# EAGLE board 16ch_omn_hirose_adapter_400mil (EAGLE 7.3.0)
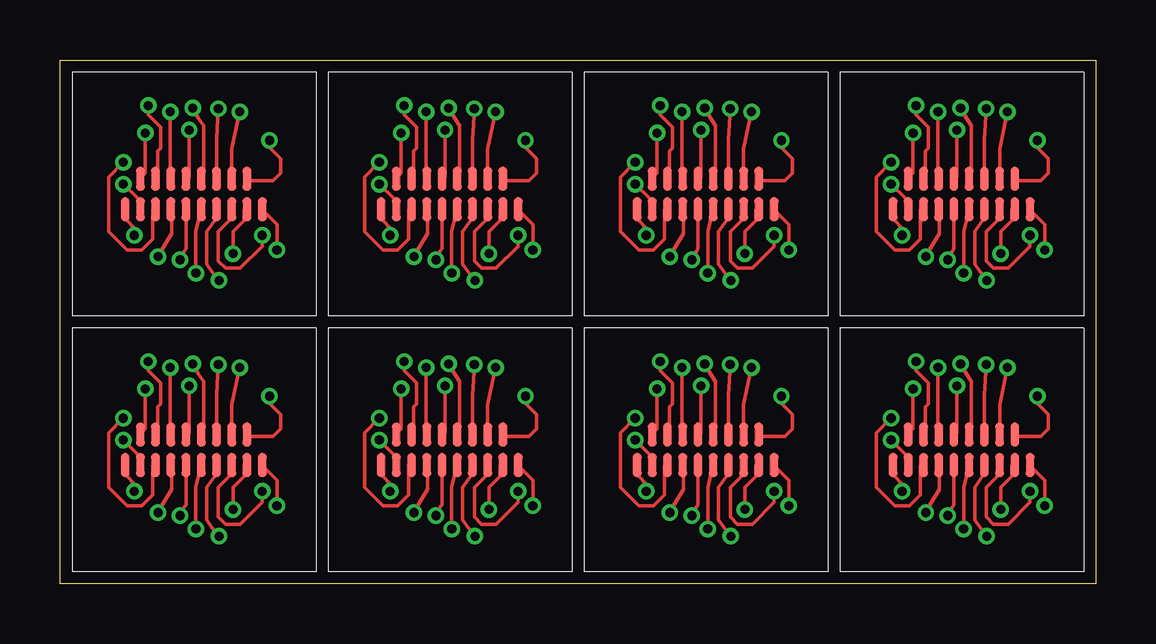
[diagram p0: board, top side]
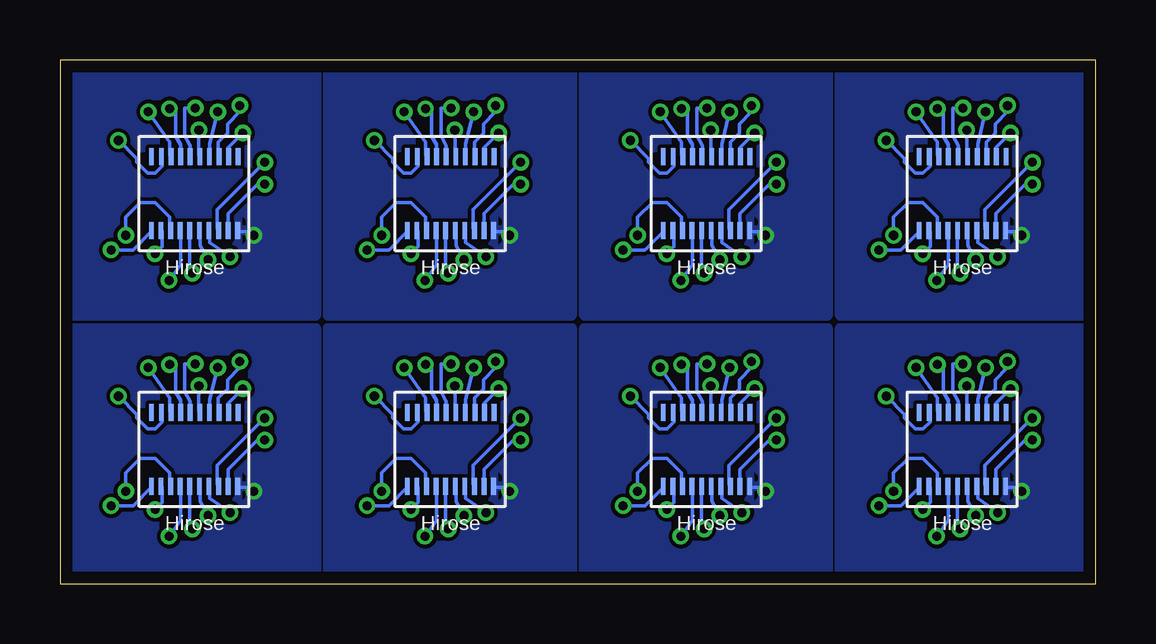
[diagram p1: board, bottom side, seen from below]

Size 43.18 x 21.84 mm. Coordinates in mm from the lower left corner, seen from the top.
Outline: 0,0 0,21.84 43.18,21.84 43.18,0 0,0
Copper layers (1*16): Top 0.035mm / dielectric 1.5mm / Bottom 0.035mm
Design rules "4pcb_33_gg *": minimum track width 6mil, minimum drill 15mil, track to track 6mil, track to pad 6mil, pad to pad 6mil, via to via 6mil, smd to smd 6mil, copper to edge 20mil, drill to drill 6mil, minimum pad ring 6mil, minimum via ring 6mil, stop-mask expansion 4mil, vias tented up to drill 0mil, thermal gap 10mil

## Footprints (pad centres in the part's own frame; a part is rotated, then mirrored left to right if it is on the bottom)
HIROSE_DF40C-70DS = smd 0.2 x 0.7: P$1 0,0; P$2 -0.4,0; P$3 -0.8,0; P$4 -1.2,0; P$5 -1.6,0; P$6 -2,0; P$7 -2.4,0; P$8 -2.8,0; P$9 -3.2,0; P$10 -3.6,0; P$36 0,-3.08; P$37 -0.42,-3.08; P$38 -0.82,-3.08; P$39 -1.22,-3.08; P$40 -1.62,-3.08; P$41 -2.02,-3.08; P$42 -2.42,-3.08; P$43 -2.82,-3.08; P$44 -3.22,-3.08; P$45 -3.62,-3.08
OMNETICS_FE18 = smd 0.381 x 1.016: P$1 -1.905,0.635; P$2 -1.27,0.635; P$3 -0.635,0.635; P$4 0,0.635; P$5 0.635,0.635; P$6 1.27,0.635; P$7 1.905,0.635; P$8 2.54,0.635; P$9 2.54,-0.635; P$10 1.905,-0.635; P$11 1.27,-0.635; P$12 0.635,-0.635; P$13 0,-0.635; P$14 -0.635,-0.635; P$15 -1.27,-0.635; P$16 -1.905,-0.635; P$17 -2.54,0.635; P$18 3.175,0.635

## Placement (x,y rotation side)
U$1  HIROSE_DF40_70PIN  [HIROSE_DF40C-70DS]  18.03,14.73 180 bottom
U$2  OMNETICS_FE18  [OMNETICS_FE18]  16.56,16.26 180 top
U$3  HIROSE_DF40_70PIN  [HIROSE_DF40C-70DS]  7.37,4.06 180 bottom
U$4  OMNETICS_FE18  [OMNETICS_FE18]  5.89,5.59 180 top
U$5  HIROSE_DF40_70PIN  [HIROSE_DF40C-70DS]  18.03,4.06 180 bottom
U$6  OMNETICS_FE18  [OMNETICS_FE18]  16.56,5.59 180 top
U$7  HIROSE_DF40_70PIN  [HIROSE_DF40C-70DS]  7.37,14.73 180 bottom
U$8  OMNETICS_FE18  [OMNETICS_FE18]  5.89,16.26 180 top
U$9  HIROSE_DF40_70PIN  [HIROSE_DF40C-70DS]  28.7,14.73 180 bottom
U$10  OMNETICS_FE18  [OMNETICS_FE18]  27.23,16.26 180 top
U$11  HIROSE_DF40_70PIN  [HIROSE_DF40C-70DS]  39.37,14.73 180 bottom
U$12  OMNETICS_FE18  [OMNETICS_FE18]  37.9,16.26 180 top
U$13  HIROSE_DF40_70PIN  [HIROSE_DF40C-70DS]  28.7,4.06 180 bottom
U$14  OMNETICS_FE18  [OMNETICS_FE18]  27.23,5.59 180 top
U$15  HIROSE_DF40_70PIN  [HIROSE_DF40C-70DS]  39.37,4.06 180 bottom
U$16  OMNETICS_FE18  [OMNETICS_FE18]  37.9,5.59 180 top

## Library data of the parts
U$1 U$3 U$5 U$7 U$9 U$11 U$13 U$15 = GG_hirose20
U$2 U$4 U$6 U$8 U$10 U$12 U$14 U$16 = connectors

## Nets
N$1: U$1.P$10 U$2.P$18
N$2: U$1.P$9 U$2.P$8
N$3: U$1.P$8 U$2.P$7
N$4: U$1.P$7 U$2.P$6
N$5: U$1.P$6 U$2.P$5
N$6: U$1.P$5 U$2.P$4
N$7: U$1.P$4 U$2.P$3
N$8: U$1.P$3 U$2.P$2
N$9: U$1.P$2 U$2.P$1
N$10: U$1.P$1 U$2.P$17
N$11: U$1.P$44 U$2.P$9
N$12: U$1.P$43 U$2.P$10
N$13: U$1.P$42 U$2.P$11
N$14: U$1.P$41 U$2.P$12
N$15: U$1.P$40 U$2.P$13
N$16: U$1.P$39 U$2.P$14
N$17: U$1.P$38 U$2.P$15
N$18: U$1.P$37 U$2.P$16
N$19: U$3.P$10 U$4.P$18
N$20: U$3.P$9 U$4.P$8
N$21: U$3.P$8 U$4.P$7
N$22: U$3.P$7 U$4.P$6
N$23: U$3.P$6 U$4.P$5
N$24: U$3.P$5 U$4.P$4
N$25: U$3.P$4 U$4.P$3
N$26: U$3.P$3 U$4.P$2
N$27: U$3.P$2 U$4.P$1
N$28: U$3.P$1 U$4.P$17
N$29: U$3.P$44 U$4.P$9
N$30: U$3.P$43 U$4.P$10
N$31: U$3.P$42 U$4.P$11
N$32: U$3.P$41 U$4.P$12
N$33: U$3.P$40 U$4.P$13
N$34: U$3.P$39 U$4.P$14
N$35: U$3.P$38 U$4.P$15
N$36: U$3.P$37 U$4.P$16
N$37: U$5.P$10 U$6.P$18
N$38: U$5.P$9 U$6.P$8
N$39: U$5.P$8 U$6.P$7
N$40: U$5.P$7 U$6.P$6
N$41: U$5.P$6 U$6.P$5
N$42: U$5.P$5 U$6.P$4
N$43: U$5.P$4 U$6.P$3
N$44: U$5.P$3 U$6.P$2
N$45: U$5.P$2 U$6.P$1
N$46: U$5.P$1 U$6.P$17
N$47: U$5.P$44 U$6.P$9
N$48: U$5.P$43 U$6.P$10
N$49: U$5.P$42 U$6.P$11
N$50: U$5.P$41 U$6.P$12
N$51: U$5.P$40 U$6.P$13
N$52: U$5.P$39 U$6.P$14
N$53: U$5.P$38 U$6.P$15
N$54: U$5.P$37 U$6.P$16
N$55: U$7.P$10 U$8.P$18
N$56: U$7.P$9 U$8.P$8
N$57: U$7.P$8 U$8.P$7
N$58: U$7.P$7 U$8.P$6
N$59: U$7.P$6 U$8.P$5
N$60: U$7.P$5 U$8.P$4
N$61: U$7.P$4 U$8.P$3
N$62: U$7.P$3 U$8.P$2
N$63: U$7.P$2 U$8.P$1
N$64: U$7.P$1 U$8.P$17
N$65: U$7.P$44 U$8.P$9
N$66: U$7.P$43 U$8.P$10
N$67: U$7.P$42 U$8.P$11
N$68: U$7.P$41 U$8.P$12
N$69: U$7.P$40 U$8.P$13
N$70: U$7.P$39 U$8.P$14
N$71: U$7.P$38 U$8.P$15
N$72: U$7.P$37 U$8.P$16
N$73: U$9.P$10 U$10.P$18
N$74: U$9.P$9 U$10.P$8
N$75: U$9.P$8 U$10.P$7
N$76: U$9.P$7 U$10.P$6
N$77: U$9.P$6 U$10.P$5
N$78: U$9.P$5 U$10.P$4
N$79: U$9.P$4 U$10.P$3
N$80: U$9.P$3 U$10.P$2
N$81: U$9.P$2 U$10.P$1
N$82: U$9.P$1 U$10.P$17
N$83: U$9.P$44 U$10.P$9
N$84: U$9.P$43 U$10.P$10
N$85: U$9.P$42 U$10.P$11
N$86: U$9.P$41 U$10.P$12
N$87: U$9.P$40 U$10.P$13
N$88: U$9.P$39 U$10.P$14
N$89: U$9.P$38 U$10.P$15
N$90: U$9.P$37 U$10.P$16
N$91: U$11.P$10 U$12.P$18
N$92: U$11.P$9 U$12.P$8
N$93: U$11.P$8 U$12.P$7
N$94: U$11.P$7 U$12.P$6
N$95: U$11.P$6 U$12.P$5
N$96: U$11.P$5 U$12.P$4
N$97: U$11.P$4 U$12.P$3
N$98: U$11.P$3 U$12.P$2
N$99: U$11.P$2 U$12.P$1
N$100: U$11.P$1 U$12.P$17
N$101: U$11.P$44 U$12.P$9
N$102: U$11.P$43 U$12.P$10
N$103: U$11.P$42 U$12.P$11
N$104: U$11.P$41 U$12.P$12
N$105: U$11.P$40 U$12.P$13
N$106: U$11.P$39 U$12.P$14
N$107: U$11.P$38 U$12.P$15
N$108: U$11.P$37 U$12.P$16
N$109: U$13.P$10 U$14.P$18
N$110: U$13.P$9 U$14.P$8
N$111: U$13.P$8 U$14.P$7
N$112: U$13.P$7 U$14.P$6
N$113: U$13.P$6 U$14.P$5
N$114: U$13.P$5 U$14.P$4
N$115: U$13.P$4 U$14.P$3
N$116: U$13.P$3 U$14.P$2
N$117: U$13.P$2 U$14.P$1
N$118: U$13.P$1 U$14.P$17
N$119: U$13.P$44 U$14.P$9
N$120: U$13.P$43 U$14.P$10
N$121: U$13.P$42 U$14.P$11
N$122: U$13.P$41 U$14.P$12
N$123: U$13.P$40 U$14.P$13
N$124: U$13.P$39 U$14.P$14
N$125: U$13.P$38 U$14.P$15
N$126: U$13.P$37 U$14.P$16
N$127: U$15.P$10 U$16.P$18
N$128: U$15.P$9 U$16.P$8
N$129: U$15.P$8 U$16.P$7
N$130: U$15.P$7 U$16.P$6
N$131: U$15.P$6 U$16.P$5
N$132: U$15.P$5 U$16.P$4
N$133: U$15.P$4 U$16.P$3
N$134: U$15.P$3 U$16.P$2
N$135: U$15.P$2 U$16.P$1
N$136: U$15.P$1 U$16.P$17
N$137: U$15.P$44 U$16.P$9
N$138: U$15.P$43 U$16.P$10
N$139: U$15.P$42 U$16.P$11
N$140: U$15.P$41 U$16.P$12
N$141: U$15.P$40 U$16.P$13
N$142: U$15.P$39 U$16.P$14
N$143: U$15.P$38 U$16.P$15
N$144: U$15.P$37 U$16.P$16

## Tracks (layer width: path | path; a pad name or v marks a point on that pad's centre or on a via)
N$1  (via drill 0.38)
  Top 0.152: v13.77,14.53 13.77,14.83 13.46,15.14 13.46,15.6 U$2.P$18
  Bottom 0.152: v13.77,14.53 13.92,14.68 14.38,14.68 U$1.P$10
  pour Bottom: 11.18,21.34 11.18,11.18 21.34,11.18 21.34,21.34
N$2  (via drill 0.38)
  Top 0.152: v13.31,16.66 13.92,16.05 13.92,15.75 U$2.P$8
  Bottom 0.152: v13.31,16.66 13.61,16.66 14.83,15.44 14.83,14.83 U$1.P$9
N$3  (via drill 0.38)
  Top 0.152: v13.31,17.58 12.7,16.97 12.7,14.68 13.46,13.92 14.07,13.92 14.53,14.38 14.53,15.6 U$2.P$7
  Bottom 0.152: v13.31,17.58 15.29,15.6 15.29,14.83 U$1.P$8
N$4  (via drill 0.38)
  Top 0.152: v14.76,13.64 14.73,13.64 15.32,14.61 15.32,15.44 15.29,15.6 U$2.P$6
  Bottom 0.152: v14.76,13.64 15.6,14.22 15.6,14.68 U$1.P$7
N$5  (via drill 0.38)
  Top 0.152: U$2.P$5 15.93,13.97 15.87,13.89 v15.67,13.51
  Bottom 0.152: v15.67,13.51 16,14.1 16,14.68 16.05,14.68 U$1.P$6
N$6  (via drill 0.38 pad 0.41)
  Top 0.152: U$2.P$4 16.33,14.68 v16.33,12.95
  Bottom 0.152: U$1.P$5 16.43,14.68 16.43,12.95 | 16.48,12.95 16.43,12.95 | 16.43,12.95 v16.33,12.95
N$7  (via drill 0.38)
  Top 0.152: v17.3,12.65 17.27,12.65 16.79,13.34 16.79,14.68 17.12,15.14 17.12,15.6 U$2.P$3
  Bottom 0.152: v17.3,12.65 16.82,13.31 16.82,14.68 U$1.P$4
N$8  (via drill 0.38)
  Top 0.152: v19.1,14.53 19.1,14.07 18.19,13.16 17.58,13.16 17.27,13.46 17.27,14.68 17.73,15.14 17.73,15.6 U$2.P$2
  Bottom 0.152: v19.1,14.53 19.1,15.29 18.49,15.9 17.88,15.9 17.27,15.29 17.27,14.83 U$1.P$3
N$9  (via drill 0.38)
  Top 0.152: v17.88,13.77 17.88,14.68 18.34,15.14 18.34,15.6 U$2.P$1
  Bottom 0.152: v17.88,13.77 17.58,14.07 17.58,14.68 U$1.P$2
N$10  (via drill 0.38)
  Top 0.152: v19.71,13.92 19.71,14.99 19.1,15.6 U$2.P$17
  Bottom 0.152: v19.71,13.92 18.8,13.92 18.03,14.68 U$1.P$1
N$11  (via drill 0.38)
  Top 0.152: v14.22,18.8 14.22,17.12 14.07,16.97 U$2.P$9
  Bottom 0.152: v14.22,18.8 14.83,18.19 14.83,17.88 U$1.P$44
N$12  (via drill 0.38 pad 0.41)
  Top 0.152: U$2.P$10 14.73,16.97 14.73,18.03 14.86,18.16 14.86,19.05 14.35,19.56 v14.35,19.94
  Bottom 0.152: U$1.P$43 15.24,17.81 15.24,18.42 14.86,18.8 14.86,19.18 14.35,19.68 v14.35,19.94
N$13  (via drill 0.38)
  Top 0.152: v15.26,19.68 15.26,17.12 15.29,16.97 U$2.P$11
  Bottom 0.152: v15.26,19.68 15.6,18.34 15.6,17.88 U$1.P$42
N$14  (via drill 0.38)
  Top 0.152: v16.05,18.92 16.05,16.97 U$2.P$12
  Bottom 0.152: v16.05,18.92 16.05,17.88 U$1.P$41
N$15  (via drill 0.38 pad 0.41)
  Top 0.152: v16.21,19.84 16.21,19.89 16.31,19.66 16.46,19.41 16.66,19.1 16.66,16.97 U$2.P$13
  Bottom 0.152: v16.21,19.84 16.64,19.84 16.64,18.69 16.41,18.26 16.41,17.73 U$1.P$40
N$16  (via drill 0.38 pad 0.41)
  Top 0.152: U$2.P$14 17.2,18.54 v17.27,19.81
  Bottom 0.152: U$1.P$39 16.81,18.32 17.02,18.67 17.02,19.81 v17.27,19.81
N$17  (via drill 0.38)
  Top 0.152: v18.16,19.68 17.83,18.14 17.83,17.42 17.73,16.97 U$2.P$15
  Bottom 0.152: v18.16,19.68 17.27,18.42 17.27,17.88 U$1.P$38
N$18  (via drill 0.38)
  Top 0.152: v19.41,18.49 19.41,18.19 19.86,17.73 19.86,17.12 19.56,16.82 18.49,16.82 U$2.P$16
  Bottom 0.152: v19.41,18.49 18.64,17.73 18.64,17.58 18.19,17.12 17.88,17.12 17.58,17.42 17.58,17.73 U$1.P$37
N$19  (via drill 0.38)
  Top 0.152: v3.1,3.86 3.1,4.17 2.79,4.47 2.79,4.93 U$4.P$18
  Bottom 0.152: v3.1,3.86 3.25,4.01 3.71,4.01 U$3.P$10
  pour Bottom: 0.51,10.67 0.51,0.51 10.67,0.51 10.67,10.67
N$20  (via drill 0.38)
  Top 0.152: v2.64,5.99 3.25,5.39 3.25,5.08 U$4.P$8
  Bottom 0.152: v2.64,5.99 2.95,5.99 4.17,4.78 4.17,4.17 U$3.P$9
N$21  (via drill 0.38)
  Top 0.152: v2.64,6.91 2.03,6.3 2.03,4.01 2.79,3.25 3.4,3.25 3.86,3.71 3.86,4.93 U$4.P$7
  Bottom 0.152: v2.64,6.91 4.62,4.93 4.62,4.17 U$3.P$8
N$22  (via drill 0.38)
  Top 0.152: v4.09,2.97 4.06,2.97 4.65,3.94 4.65,4.78 4.62,4.93 U$4.P$6
  Bottom 0.152: v4.09,2.97 4.93,3.56 4.93,4.01 U$3.P$7
N$23  (via drill 0.38)
  Top 0.152: U$4.P$5 5.26,3.3 5.21,3.23 v5,2.85
  Bottom 0.152: v5,2.85 5.33,3.43 5.33,4.01 5.38,4.01 U$3.P$6
N$24  (via drill 0.38 pad 0.41)
  Top 0.152: U$4.P$4 5.66,4.01 v5.66,2.29
  Bottom 0.152: U$3.P$5 5.77,4.01 5.77,2.29 | 5.81,2.29 5.77,2.29 | 5.77,2.29 v5.66,2.29
N$25  (via drill 0.38)
  Top 0.152: v6.63,1.98 6.6,1.98 6.12,2.67 6.12,4.01 6.45,4.47 6.45,4.93 U$4.P$3
  Bottom 0.152: v6.63,1.98 6.15,2.64 6.15,4.01 U$3.P$4
N$26  (via drill 0.38)
  Top 0.152: v8.43,3.86 8.43,3.4 7.52,2.49 6.91,2.49 6.6,2.79 6.6,4.01 7.06,4.47 7.06,4.93 U$4.P$2
  Bottom 0.152: v8.43,3.86 8.43,4.62 7.82,5.23 7.21,5.23 6.6,4.62 6.6,4.17 U$3.P$3
N$27  (via drill 0.38)
  Top 0.152: v7.21,3.1 7.21,4.01 7.67,4.47 7.67,4.93 U$4.P$1
  Bottom 0.152: v7.21,3.1 6.91,3.4 6.91,4.01 U$3.P$2
N$28  (via drill 0.38)
  Top 0.152: v9.04,3.25 9.04,4.32 8.43,4.93 U$4.P$17
  Bottom 0.152: v9.04,3.25 8.13,3.25 7.37,4.01 U$3.P$1
N$29  (via drill 0.38)
  Top 0.152: v3.56,8.13 3.56,6.45 3.4,6.3 U$4.P$9
  Bottom 0.152: v3.56,8.13 4.17,7.52 4.17,7.21 U$3.P$44
N$30  (via drill 0.38 pad 0.41)
  Top 0.152: U$4.P$10 4.06,6.3 4.06,7.37 4.19,7.49 4.19,8.38 3.68,8.89 v3.68,9.27
  Bottom 0.152: U$3.P$43 4.57,7.14 4.57,7.75 4.19,8.13 4.19,8.51 3.68,9.02 v3.68,9.27
N$31  (via drill 0.38)
  Top 0.152: v4.6,9.02 4.6,6.45 4.62,6.3 U$4.P$11
  Bottom 0.152: v4.6,9.02 4.93,7.67 4.93,7.21 U$3.P$42
N$32  (via drill 0.38)
  Top 0.152: v5.38,8.25 5.38,6.3 U$4.P$12
  Bottom 0.152: v5.38,8.25 5.38,7.21 U$3.P$41
N$33  (via drill 0.38 pad 0.41)
  Top 0.152: v5.54,9.17 5.54,9.22 5.64,8.99 5.79,8.74 5.99,8.43 5.99,6.3 U$4.P$13
  Bottom 0.152: v5.54,9.17 5.97,9.17 5.97,8.03 5.74,7.6 5.74,7.06 U$3.P$40
N$34  (via drill 0.38 pad 0.41)
  Top 0.152: U$4.P$14 6.53,7.87 v6.6,9.14
  Bottom 0.152: U$3.P$39 6.15,7.65 6.35,8 6.35,9.14 v6.6,9.14
N$35  (via drill 0.38)
  Top 0.152: v7.49,9.02 7.16,7.47 7.16,6.76 7.06,6.3 U$4.P$15
  Bottom 0.152: v7.49,9.02 6.6,7.75 6.6,7.21 U$3.P$38
N$36  (via drill 0.38)
  Top 0.152: v8.74,7.82 8.74,7.52 9.2,7.06 9.2,6.45 8.89,6.15 7.82,6.15 U$4.P$16
  Bottom 0.152: v8.74,7.82 7.98,7.06 7.98,6.91 7.52,6.45 7.21,6.45 6.91,6.76 6.91,7.06 U$3.P$37
N$37  (via drill 0.38)
  Top 0.152: v13.77,3.86 13.77,4.17 13.46,4.47 13.46,4.93 U$6.P$18
  Bottom 0.152: v13.77,3.86 13.92,4.01 14.38,4.01 U$5.P$10
  pour Bottom: 11.18,10.67 11.18,0.51 21.34,0.51 21.34,10.67
N$38  (via drill 0.38)
  Top 0.152: v13.31,5.99 13.92,5.39 13.92,5.08 U$6.P$8
  Bottom 0.152: v13.31,5.99 13.61,5.99 14.83,4.78 14.83,4.17 U$5.P$9
N$39  (via drill 0.38)
  Top 0.152: v13.31,6.91 12.7,6.3 12.7,4.01 13.46,3.25 14.07,3.25 14.53,3.71 14.53,4.93 U$6.P$7
  Bottom 0.152: v13.31,6.91 15.29,4.93 15.29,4.17 U$5.P$8
N$40  (via drill 0.38)
  Top 0.152: v14.76,2.97 14.73,2.97 15.32,3.94 15.32,4.78 15.29,4.93 U$6.P$6
  Bottom 0.152: v14.76,2.97 15.6,3.56 15.6,4.01 U$5.P$7
N$41  (via drill 0.38)
  Top 0.152: U$6.P$5 15.93,3.3 15.87,3.23 v15.67,2.85
  Bottom 0.152: v15.67,2.85 16,3.43 16,4.01 16.05,4.01 U$5.P$6
N$42  (via drill 0.38 pad 0.41)
  Top 0.152: U$6.P$4 16.33,4.01 v16.33,2.29
  Bottom 0.152: U$5.P$5 16.43,4.01 16.43,2.29 | 16.48,2.29 16.43,2.29 | 16.43,2.29 v16.33,2.29
N$43  (via drill 0.38)
  Top 0.152: v17.3,1.98 17.27,1.98 16.79,2.67 16.79,4.01 17.12,4.47 17.12,4.93 U$6.P$3
  Bottom 0.152: v17.3,1.98 16.82,2.64 16.82,4.01 U$5.P$4
N$44  (via drill 0.38)
  Top 0.152: v19.1,3.86 19.1,3.4 18.19,2.49 17.58,2.49 17.27,2.79 17.27,4.01 17.73,4.47 17.73,4.93 U$6.P$2
  Bottom 0.152: v19.1,3.86 19.1,4.62 18.49,5.23 17.88,5.23 17.27,4.62 17.27,4.17 U$5.P$3
N$45  (via drill 0.38)
  Top 0.152: v17.88,3.1 17.88,4.01 18.34,4.47 18.34,4.93 U$6.P$1
  Bottom 0.152: v17.88,3.1 17.58,3.4 17.58,4.01 U$5.P$2
N$46  (via drill 0.38)
  Top 0.152: v19.71,3.25 19.71,4.32 19.1,4.93 U$6.P$17
  Bottom 0.152: v19.71,3.25 18.8,3.25 18.03,4.01 U$5.P$1
N$47  (via drill 0.38)
  Top 0.152: v14.22,8.13 14.22,6.45 14.07,6.3 U$6.P$9
  Bottom 0.152: v14.22,8.13 14.83,7.52 14.83,7.21 U$5.P$44
N$48  (via drill 0.38 pad 0.41)
  Top 0.152: U$6.P$10 14.73,6.3 14.73,7.37 14.86,7.49 14.86,8.38 14.35,8.89 v14.35,9.27
  Bottom 0.152: U$5.P$43 15.24,7.14 15.24,7.75 14.86,8.13 14.86,8.51 14.35,9.02 v14.35,9.27
N$49  (via drill 0.38)
  Top 0.152: v15.26,9.02 15.26,6.45 15.29,6.3 U$6.P$11
  Bottom 0.152: v15.26,9.02 15.6,7.67 15.6,7.21 U$5.P$42
N$50  (via drill 0.38)
  Top 0.152: v16.05,8.25 16.05,6.3 U$6.P$12
  Bottom 0.152: v16.05,8.25 16.05,7.21 U$5.P$41
N$51  (via drill 0.38 pad 0.41)
  Top 0.152: v16.21,9.17 16.21,9.22 16.31,8.99 16.46,8.74 16.66,8.43 16.66,6.3 U$6.P$13
  Bottom 0.152: v16.21,9.17 16.64,9.17 16.64,8.03 16.41,7.6 16.41,7.06 U$5.P$40
N$52  (via drill 0.38 pad 0.41)
  Top 0.152: U$6.P$14 17.2,7.87 v17.27,9.14
  Bottom 0.152: U$5.P$39 16.81,7.65 17.02,8 17.02,9.14 v17.27,9.14
N$53  (via drill 0.38)
  Top 0.152: v18.16,9.02 17.83,7.47 17.83,6.76 17.73,6.3 U$6.P$15
  Bottom 0.152: v18.16,9.02 17.27,7.75 17.27,7.21 U$5.P$38
N$54  (via drill 0.38)
  Top 0.152: v19.41,7.82 19.41,7.52 19.86,7.06 19.86,6.45 19.56,6.15 18.49,6.15 U$6.P$16
  Bottom 0.152: v19.41,7.82 18.64,7.06 18.64,6.91 18.19,6.45 17.88,6.45 17.58,6.76 17.58,7.06 U$5.P$37
N$55  (via drill 0.38)
  Top 0.152: v3.1,14.53 3.1,14.83 2.79,15.14 2.79,15.6 U$8.P$18
  Bottom 0.152: v3.1,14.53 3.25,14.68 3.71,14.68 U$7.P$10
  pour Bottom: 0.51,21.34 0.51,11.18 10.67,11.18 10.67,21.34
N$56  (via drill 0.38)
  Top 0.152: v2.64,16.66 3.25,16.05 3.25,15.75 U$8.P$8
  Bottom 0.152: v2.64,16.66 2.95,16.66 4.17,15.44 4.17,14.83 U$7.P$9
N$57  (via drill 0.38)
  Top 0.152: v2.64,17.58 2.03,16.97 2.03,14.68 2.79,13.92 3.4,13.92 3.86,14.38 3.86,15.6 U$8.P$7
  Bottom 0.152: v2.64,17.58 4.62,15.6 4.62,14.83 U$7.P$8
N$58  (via drill 0.38)
  Top 0.152: v4.09,13.64 4.06,13.64 4.65,14.61 4.65,15.44 4.62,15.6 U$8.P$6
  Bottom 0.152: v4.09,13.64 4.93,14.22 4.93,14.68 U$7.P$7
N$59  (via drill 0.38)
  Top 0.152: U$8.P$5 5.26,13.97 5.21,13.89 v5,13.51
  Bottom 0.152: v5,13.51 5.33,14.1 5.33,14.68 5.38,14.68 U$7.P$6
N$60  (via drill 0.38 pad 0.41)
  Top 0.152: U$8.P$4 5.66,14.68 v5.66,12.95
  Bottom 0.152: U$7.P$5 5.77,14.68 5.77,12.95 | 5.81,12.95 5.77,12.95 | 5.77,12.95 v5.66,12.95
N$61  (via drill 0.38)
  Top 0.152: v6.63,12.65 6.6,12.65 6.12,13.34 6.12,14.68 6.45,15.14 6.45,15.6 U$8.P$3
  Bottom 0.152: v6.63,12.65 6.15,13.31 6.15,14.68 U$7.P$4
N$62  (via drill 0.38)
  Top 0.152: v8.43,14.53 8.43,14.07 7.52,13.16 6.91,13.16 6.6,13.46 6.6,14.68 7.06,15.14 7.06,15.6 U$8.P$2
  Bottom 0.152: v8.43,14.53 8.43,15.29 7.82,15.9 7.21,15.9 6.6,15.29 6.6,14.83 U$7.P$3
N$63  (via drill 0.38)
  Top 0.152: v7.21,13.77 7.21,14.68 7.67,15.14 7.67,15.6 U$8.P$1
  Bottom 0.152: v7.21,13.77 6.91,14.07 6.91,14.68 U$7.P$2
N$64  (via drill 0.38)
  Top 0.152: v9.04,13.92 9.04,14.99 8.43,15.6 U$8.P$17
  Bottom 0.152: v9.04,13.92 8.13,13.92 7.37,14.68 U$7.P$1
N$65  (via drill 0.38)
  Top 0.152: v3.56,18.8 3.56,17.12 3.4,16.97 U$8.P$9
  Bottom 0.152: v3.56,18.8 4.17,18.19 4.17,17.88 U$7.P$44
N$66  (via drill 0.38 pad 0.41)
  Top 0.152: U$8.P$10 4.06,16.97 4.06,18.03 4.19,18.16 4.19,19.05 3.68,19.56 v3.68,19.94
  Bottom 0.152: U$7.P$43 4.57,17.81 4.57,18.42 4.19,18.8 4.19,19.18 3.68,19.68 v3.68,19.94
N$67  (via drill 0.38)
  Top 0.152: v4.6,19.68 4.6,17.12 4.62,16.97 U$8.P$11
  Bottom 0.152: v4.6,19.68 4.93,18.34 4.93,17.88 U$7.P$42
N$68  (via drill 0.38)
  Top 0.152: v5.38,18.92 5.38,16.97 U$8.P$12
  Bottom 0.152: v5.38,18.92 5.38,17.88 U$7.P$41
N$69  (via drill 0.38 pad 0.41)
  Top 0.152: v5.54,19.84 5.54,19.89 5.64,19.66 5.79,19.41 5.99,19.1 5.99,16.97 U$8.P$13
  Bottom 0.152: v5.54,19.84 5.97,19.84 5.97,18.69 5.74,18.26 5.74,17.73 U$7.P$40
N$70  (via drill 0.38 pad 0.41)
  Top 0.152: U$8.P$14 6.53,18.54 v6.6,19.81
  Bottom 0.152: U$7.P$39 6.15,18.32 6.35,18.67 6.35,19.81 v6.6,19.81
N$71  (via drill 0.38)
  Top 0.152: v7.49,19.68 7.16,18.14 7.16,17.42 7.06,16.97 U$8.P$15
  Bottom 0.152: v7.49,19.68 6.6,18.42 6.6,17.88 U$7.P$38
N$72  (via drill 0.38)
  Top 0.152: v8.74,18.49 8.74,18.19 9.2,17.73 9.2,17.12 8.89,16.82 7.82,16.82 U$8.P$16
  Bottom 0.152: v8.74,18.49 7.98,17.73 7.98,17.58 7.52,17.12 7.21,17.12 6.91,17.42 6.91,17.73 U$7.P$37
N$73  (via drill 0.38)
  Top 0.152: v24.43,14.53 24.43,14.83 24.13,15.14 24.13,15.6 U$10.P$18
  Bottom 0.152: v24.43,14.53 24.59,14.68 25.04,14.68 U$9.P$10
  pour Bottom: 21.84,21.34 21.84,11.18 32,11.18 32,21.34
N$74  (via drill 0.38)
  Top 0.152: v23.98,16.66 24.59,16.05 24.59,15.75 U$10.P$8
  Bottom 0.152: v23.98,16.66 24.28,16.66 25.5,15.44 25.5,14.83 U$9.P$9
N$75  (via drill 0.38)
  Top 0.152: v23.98,17.58 23.37,16.97 23.37,14.68 24.13,13.92 24.74,13.92 25.2,14.38 25.2,15.6 U$10.P$7
  Bottom 0.152: v23.98,17.58 25.96,15.6 25.96,14.83 U$9.P$8
N$76  (via drill 0.38)
  Top 0.152: v25.43,13.64 25.4,13.64 25.98,14.61 25.98,15.44 25.96,15.6 U$10.P$6
  Bottom 0.152: v25.43,13.64 26.26,14.22 26.26,14.68 U$9.P$7
N$77  (via drill 0.38)
  Top 0.152: U$10.P$5 26.59,13.97 26.54,13.89 v26.34,13.51
  Bottom 0.152: v26.34,13.51 26.67,14.1 26.67,14.68 26.72,14.68 U$9.P$6
N$78  (via drill 0.38 pad 0.41)
  Top 0.152: U$10.P$4 27,14.68 v27,12.95
  Bottom 0.152: U$9.P$5 27.1,14.68 27.1,12.95 | 27.15,12.95 27.1,12.95 | 27.1,12.95 v27,12.95
N$79  (via drill 0.38)
  Top 0.152: v27.96,12.65 27.94,12.65 27.46,13.34 27.46,14.68 27.79,15.14 27.79,15.6 U$10.P$3
  Bottom 0.152: v27.96,12.65 27.48,13.31 27.48,14.68 U$9.P$4
N$80  (via drill 0.38)
  Top 0.152: v29.77,14.53 29.77,14.07 28.85,13.16 28.24,13.16 27.94,13.46 27.94,14.68 28.4,15.14 28.4,15.6 U$10.P$2
  Bottom 0.152: v29.77,14.53 29.77,15.29 29.16,15.9 28.55,15.9 27.94,15.29 27.94,14.83 U$9.P$3
N$81  (via drill 0.38)
  Top 0.152: v28.55,13.77 28.55,14.68 29.01,15.14 29.01,15.6 U$10.P$1
  Bottom 0.152: v28.55,13.77 28.24,14.07 28.24,14.68 U$9.P$2
N$82  (via drill 0.38)
  Top 0.152: v30.38,13.92 30.38,14.99 29.77,15.6 U$10.P$17
  Bottom 0.152: v30.38,13.92 29.46,13.92 28.7,14.68 U$9.P$1
N$83  (via drill 0.38)
  Top 0.152: v24.89,18.8 24.89,17.12 24.74,16.97 U$10.P$9
  Bottom 0.152: v24.89,18.8 25.5,18.19 25.5,17.88 U$9.P$44
N$84  (via drill 0.38 pad 0.41)
  Top 0.152: U$10.P$10 25.4,16.97 25.4,18.03 25.53,18.16 25.53,19.05 25.02,19.56 v25.02,19.94
  Bottom 0.152: U$9.P$43 25.91,17.81 25.91,18.42 25.53,18.8 25.53,19.18 25.02,19.68 v25.02,19.94
N$85  (via drill 0.38)
  Top 0.152: v25.93,19.68 25.93,17.12 25.96,16.97 U$10.P$11
  Bottom 0.152: v25.93,19.68 26.26,18.34 26.26,17.88 U$9.P$42
N$86  (via drill 0.38)
  Top 0.152: v26.72,18.92 26.72,16.97 U$10.P$12
  Bottom 0.152: v26.72,18.92 26.72,17.88 U$9.P$41
N$87  (via drill 0.38 pad 0.41)
  Top 0.152: v26.87,19.84 26.87,19.89 26.98,19.66 27.13,19.41 27.33,19.1 27.33,16.97 U$10.P$13
  Bottom 0.152: v26.87,19.84 27.3,19.84 27.3,18.69 27.08,18.26 27.08,17.73 U$9.P$40
N$88  (via drill 0.38 pad 0.41)
  Top 0.152: U$10.P$14 27.86,18.54 v27.94,19.81
  Bottom 0.152: U$9.P$39 27.48,18.32 27.69,18.67 27.69,19.81 v27.94,19.81
N$89  (via drill 0.38)
  Top 0.152: v28.83,19.68 28.5,18.14 28.5,17.42 28.4,16.97 U$10.P$15
  Bottom 0.152: v28.83,19.68 27.94,18.42 27.94,17.88 U$9.P$38
N$90  (via drill 0.38)
  Top 0.152: v30.07,18.49 30.07,18.19 30.53,17.73 30.53,17.12 30.23,16.82 29.16,16.82 U$10.P$16
  Bottom 0.152: v30.07,18.49 29.31,17.73 29.31,17.58 28.85,17.12 28.55,17.12 28.24,17.42 28.24,17.73 U$9.P$37
N$91  (via drill 0.38)
  Top 0.152: v35.1,14.53 35.1,14.83 34.8,15.14 34.8,15.6 U$12.P$18
  Bottom 0.152: v35.1,14.53 35.26,14.68 35.71,14.68 U$11.P$10
  pour Bottom: 32.51,21.34 32.51,11.18 42.67,11.18 42.67,21.34
N$92  (via drill 0.38)
  Top 0.152: v34.65,16.66 35.26,16.05 35.26,15.75 U$12.P$8
  Bottom 0.152: v34.65,16.66 34.95,16.66 36.17,15.44 36.17,14.83 U$11.P$9
N$93  (via drill 0.38)
  Top 0.152: v34.65,17.58 34.04,16.97 34.04,14.68 34.8,13.92 35.41,13.92 35.87,14.38 35.87,15.6 U$12.P$7
  Bottom 0.152: v34.65,17.58 36.63,15.6 36.63,14.83 U$11.P$8
N$94  (via drill 0.38)
  Top 0.152: v36.09,13.64 36.07,13.64 36.65,14.61 36.65,15.44 36.63,15.6 U$12.P$6
  Bottom 0.152: v36.09,13.64 36.93,14.22 36.93,14.68 U$11.P$7
N$95  (via drill 0.38)
  Top 0.152: U$12.P$5 37.26,13.97 37.21,13.89 v37.01,13.51
  Bottom 0.152: v37.01,13.51 37.34,14.1 37.34,14.68 37.39,14.68 U$11.P$6
N$96  (via drill 0.38 pad 0.41)
  Top 0.152: U$12.P$4 37.67,14.68 v37.67,12.95
  Bottom 0.152: U$11.P$5 37.77,14.68 37.77,12.95 | 37.81,12.95 37.77,12.95 | 37.77,12.95 v37.67,12.95
N$97  (via drill 0.38)
  Top 0.152: v38.63,12.65 38.61,12.65 38.12,13.34 38.12,14.68 38.46,15.14 38.46,15.6 U$12.P$3
  Bottom 0.152: v38.63,12.65 38.15,13.31 38.15,14.68 U$11.P$4
N$98  (via drill 0.38)
  Top 0.152: v40.44,14.53 40.44,14.07 39.52,13.16 38.91,13.16 38.61,13.46 38.61,14.68 39.07,15.14 39.07,15.6 U$12.P$2
  Bottom 0.152: v40.44,14.53 40.44,15.29 39.83,15.9 39.22,15.9 38.61,15.29 38.61,14.83 U$11.P$3
N$99  (via drill 0.38)
  Top 0.152: v39.22,13.77 39.22,14.68 39.68,15.14 39.68,15.6 U$12.P$1
  Bottom 0.152: v39.22,13.77 38.91,14.07 38.91,14.68 U$11.P$2
N$100  (via drill 0.38)
  Top 0.152: v41.05,13.92 41.05,14.99 40.44,15.6 U$12.P$17
  Bottom 0.152: v41.05,13.92 40.13,13.92 39.37,14.68 U$11.P$1
N$101  (via drill 0.38)
  Top 0.152: v35.56,18.8 35.56,17.12 35.41,16.97 U$12.P$9
  Bottom 0.152: v35.56,18.8 36.17,18.19 36.17,17.88 U$11.P$44
N$102  (via drill 0.38 pad 0.41)
  Top 0.152: U$12.P$10 36.07,16.97 36.07,18.03 36.2,18.16 36.2,19.05 35.69,19.56 v35.69,19.94
  Bottom 0.152: U$11.P$43 36.58,17.81 36.58,18.42 36.2,18.8 36.2,19.18 35.69,19.68 v35.69,19.94
N$103  (via drill 0.38)
  Top 0.152: v36.6,19.68 36.6,17.12 36.63,16.97 U$12.P$11
  Bottom 0.152: v36.6,19.68 36.93,18.34 36.93,17.88 U$11.P$42
N$104  (via drill 0.38)
  Top 0.152: v37.39,18.92 37.39,16.97 U$12.P$12
  Bottom 0.152: v37.39,18.92 37.39,17.88 U$11.P$41
N$105  (via drill 0.38 pad 0.41)
  Top 0.152: v37.54,19.84 37.54,19.89 37.64,19.66 37.79,19.41 38,19.1 38,16.97 U$12.P$13
  Bottom 0.152: v37.54,19.84 37.97,19.84 37.97,18.69 37.74,18.26 37.74,17.73 U$11.P$40
N$106  (via drill 0.38 pad 0.41)
  Top 0.152: U$12.P$14 38.53,18.54 v38.61,19.81
  Bottom 0.152: U$11.P$39 38.15,18.32 38.35,18.67 38.35,19.81 v38.61,19.81
N$107  (via drill 0.38)
  Top 0.152: v39.5,19.68 39.17,18.14 39.17,17.42 39.07,16.97 U$12.P$15
  Bottom 0.152: v39.5,19.68 38.61,18.42 38.61,17.88 U$11.P$38
N$108  (via drill 0.38)
  Top 0.152: v40.74,18.49 40.74,18.19 41.2,17.73 41.2,17.12 40.89,16.82 39.83,16.82 U$12.P$16
  Bottom 0.152: v40.74,18.49 39.98,17.73 39.98,17.58 39.52,17.12 39.22,17.12 38.91,17.42 38.91,17.73 U$11.P$37
N$109  (via drill 0.38)
  Top 0.152: v24.43,3.86 24.43,4.17 24.13,4.47 24.13,4.93 U$14.P$18
  Bottom 0.152: v24.43,3.86 24.59,4.01 25.04,4.01 U$13.P$10
  pour Bottom: 21.84,10.67 21.84,0.51 32,0.51 32,10.67
N$110  (via drill 0.38)
  Top 0.152: v23.98,5.99 24.59,5.39 24.59,5.08 U$14.P$8
  Bottom 0.152: v23.98,5.99 24.28,5.99 25.5,4.78 25.5,4.17 U$13.P$9
N$111  (via drill 0.38)
  Top 0.152: v23.98,6.91 23.37,6.3 23.37,4.01 24.13,3.25 24.74,3.25 25.2,3.71 25.2,4.93 U$14.P$7
  Bottom 0.152: v23.98,6.91 25.96,4.93 25.96,4.17 U$13.P$8
N$112  (via drill 0.38)
  Top 0.152: v25.43,2.97 25.4,2.97 25.98,3.94 25.98,4.78 25.96,4.93 U$14.P$6
  Bottom 0.152: v25.43,2.97 26.26,3.56 26.26,4.01 U$13.P$7
N$113  (via drill 0.38)
  Top 0.152: U$14.P$5 26.59,3.3 26.54,3.23 v26.34,2.85
  Bottom 0.152: v26.34,2.85 26.67,3.43 26.67,4.01 26.72,4.01 U$13.P$6
N$114  (via drill 0.38 pad 0.41)
  Top 0.152: U$14.P$4 27,4.01 v27,2.29
  Bottom 0.152: U$13.P$5 27.1,4.01 27.1,2.29 | 27.15,2.29 27.1,2.29 | 27.1,2.29 v27,2.29
N$115  (via drill 0.38)
  Top 0.152: v27.96,1.98 27.94,1.98 27.46,2.67 27.46,4.01 27.79,4.47 27.79,4.93 U$14.P$3
  Bottom 0.152: v27.96,1.98 27.48,2.64 27.48,4.01 U$13.P$4
N$116  (via drill 0.38)
  Top 0.152: v29.77,3.86 29.77,3.4 28.85,2.49 28.24,2.49 27.94,2.79 27.94,4.01 28.4,4.47 28.4,4.93 U$14.P$2
  Bottom 0.152: v29.77,3.86 29.77,4.62 29.16,5.23 28.55,5.23 27.94,4.62 27.94,4.17 U$13.P$3
N$117  (via drill 0.38)
  Top 0.152: v28.55,3.1 28.55,4.01 29.01,4.47 29.01,4.93 U$14.P$1
  Bottom 0.152: v28.55,3.1 28.24,3.4 28.24,4.01 U$13.P$2
N$118  (via drill 0.38)
  Top 0.152: v30.38,3.25 30.38,4.32 29.77,4.93 U$14.P$17
  Bottom 0.152: v30.38,3.25 29.46,3.25 28.7,4.01 U$13.P$1
N$119  (via drill 0.38)
  Top 0.152: v24.89,8.13 24.89,6.45 24.74,6.3 U$14.P$9
  Bottom 0.152: v24.89,8.13 25.5,7.52 25.5,7.21 U$13.P$44
N$120  (via drill 0.38 pad 0.41)
  Top 0.152: U$14.P$10 25.4,6.3 25.4,7.37 25.53,7.49 25.53,8.38 25.02,8.89 v25.02,9.27
  Bottom 0.152: U$13.P$43 25.91,7.14 25.91,7.75 25.53,8.13 25.53,8.51 25.02,9.02 v25.02,9.27
N$121  (via drill 0.38)
  Top 0.152: v25.93,9.02 25.93,6.45 25.96,6.3 U$14.P$11
  Bottom 0.152: v25.93,9.02 26.26,7.67 26.26,7.21 U$13.P$42
N$122  (via drill 0.38)
  Top 0.152: v26.72,8.25 26.72,6.3 U$14.P$12
  Bottom 0.152: v26.72,8.25 26.72,7.21 U$13.P$41
N$123  (via drill 0.38 pad 0.41)
  Top 0.152: v26.87,9.17 26.87,9.22 26.98,8.99 27.13,8.74 27.33,8.43 27.33,6.3 U$14.P$13
  Bottom 0.152: v26.87,9.17 27.3,9.17 27.3,8.03 27.08,7.6 27.08,7.06 U$13.P$40
N$124  (via drill 0.38 pad 0.41)
  Top 0.152: U$14.P$14 27.86,7.87 v27.94,9.14
  Bottom 0.152: U$13.P$39 27.48,7.65 27.69,8 27.69,9.14 v27.94,9.14
N$125  (via drill 0.38)
  Top 0.152: v28.83,9.02 28.5,7.47 28.5,6.76 28.4,6.3 U$14.P$15
  Bottom 0.152: v28.83,9.02 27.94,7.75 27.94,7.21 U$13.P$38
N$126  (via drill 0.38)
  Top 0.152: v30.07,7.82 30.07,7.52 30.53,7.06 30.53,6.45 30.23,6.15 29.16,6.15 U$14.P$16
  Bottom 0.152: v30.07,7.82 29.31,7.06 29.31,6.91 28.85,6.45 28.55,6.45 28.24,6.76 28.24,7.06 U$13.P$37
N$127  (via drill 0.38)
  Top 0.152: v35.1,3.86 35.1,4.17 34.8,4.47 34.8,4.93 U$16.P$18
  Bottom 0.152: v35.1,3.86 35.26,4.01 35.71,4.01 U$15.P$10
  pour Bottom: 32.51,10.67 32.51,0.51 42.67,0.51 42.67,10.67
N$128  (via drill 0.38)
  Top 0.152: v34.65,5.99 35.26,5.39 35.26,5.08 U$16.P$8
  Bottom 0.152: v34.65,5.99 34.95,5.99 36.17,4.78 36.17,4.17 U$15.P$9
N$129  (via drill 0.38)
  Top 0.152: v34.65,6.91 34.04,6.3 34.04,4.01 34.8,3.25 35.41,3.25 35.87,3.71 35.87,4.93 U$16.P$7
  Bottom 0.152: v34.65,6.91 36.63,4.93 36.63,4.17 U$15.P$8
N$130  (via drill 0.38)
  Top 0.152: v36.09,2.97 36.07,2.97 36.65,3.94 36.65,4.78 36.63,4.93 U$16.P$6
  Bottom 0.152: v36.09,2.97 36.93,3.56 36.93,4.01 U$15.P$7
N$131  (via drill 0.38)
  Top 0.152: U$16.P$5 37.26,3.3 37.21,3.23 v37.01,2.85
  Bottom 0.152: v37.01,2.85 37.34,3.43 37.34,4.01 37.39,4.01 U$15.P$6
N$132  (via drill 0.38 pad 0.41)
  Top 0.152: U$16.P$4 37.67,4.01 v37.67,2.29
  Bottom 0.152: U$15.P$5 37.77,4.01 37.77,2.29 | 37.81,2.29 37.77,2.29 | 37.77,2.29 v37.67,2.29
N$133  (via drill 0.38)
  Top 0.152: v38.63,1.98 38.61,1.98 38.12,2.67 38.12,4.01 38.46,4.47 38.46,4.93 U$16.P$3
  Bottom 0.152: v38.63,1.98 38.15,2.64 38.15,4.01 U$15.P$4
N$134  (via drill 0.38)
  Top 0.152: v40.44,3.86 40.44,3.4 39.52,2.49 38.91,2.49 38.61,2.79 38.61,4.01 39.07,4.47 39.07,4.93 U$16.P$2
  Bottom 0.152: v40.44,3.86 40.44,4.62 39.83,5.23 39.22,5.23 38.61,4.62 38.61,4.17 U$15.P$3
N$135  (via drill 0.38)
  Top 0.152: v39.22,3.1 39.22,4.01 39.68,4.47 39.68,4.93 U$16.P$1
  Bottom 0.152: v39.22,3.1 38.91,3.4 38.91,4.01 U$15.P$2
N$136  (via drill 0.38)
  Top 0.152: v41.05,3.25 41.05,4.32 40.44,4.93 U$16.P$17
  Bottom 0.152: v41.05,3.25 40.13,3.25 39.37,4.01 U$15.P$1
N$137  (via drill 0.38)
  Top 0.152: v35.56,8.13 35.56,6.45 35.41,6.3 U$16.P$9
  Bottom 0.152: v35.56,8.13 36.17,7.52 36.17,7.21 U$15.P$44
N$138  (via drill 0.38 pad 0.41)
  Top 0.152: U$16.P$10 36.07,6.3 36.07,7.37 36.2,7.49 36.2,8.38 35.69,8.89 v35.69,9.27
  Bottom 0.152: U$15.P$43 36.58,7.14 36.58,7.75 36.2,8.13 36.2,8.51 35.69,9.02 v35.69,9.27
N$139  (via drill 0.38)
  Top 0.152: v36.6,9.02 36.6,6.45 36.63,6.3 U$16.P$11
  Bottom 0.152: v36.6,9.02 36.93,7.67 36.93,7.21 U$15.P$42
N$140  (via drill 0.38)
  Top 0.152: v37.39,8.25 37.39,6.3 U$16.P$12
  Bottom 0.152: v37.39,8.25 37.39,7.21 U$15.P$41
N$141  (via drill 0.38 pad 0.41)
  Top 0.152: v37.54,9.17 37.54,9.22 37.64,8.99 37.79,8.74 38,8.43 38,6.3 U$16.P$13
  Bottom 0.152: v37.54,9.17 37.97,9.17 37.97,8.03 37.74,7.6 37.74,7.06 U$15.P$40
N$142  (via drill 0.38 pad 0.41)
  Top 0.152: U$16.P$14 38.53,7.87 v38.61,9.14
  Bottom 0.152: U$15.P$39 38.15,7.65 38.35,8 38.35,9.14 v38.61,9.14
N$143  (via drill 0.38)
  Top 0.152: v39.5,9.02 39.17,7.47 39.17,6.76 39.07,6.3 U$16.P$15
  Bottom 0.152: v39.5,9.02 38.61,7.75 38.61,7.21 U$15.P$38
N$144  (via drill 0.38)
  Top 0.152: v40.74,7.82 40.74,7.52 41.2,7.06 41.2,6.45 40.89,6.15 39.83,6.15 U$16.P$16
  Bottom 0.152: v40.74,7.82 39.98,7.06 39.98,6.91 39.52,6.45 39.22,6.45 38.91,6.76 38.91,7.06 U$15.P$37